# Altium PCB PCB1.PcbDoc
Units mil, origin at the board's own origin, x right, y up, seen from the top; angles counter-clockwise.
Board outline 3740.16 x 2755.91 mil, 2 copper layers (Top Layer, Bottom Layer); 17 components, 18 nets, 97 pads, 0 vias.
Unrouted connection lines stored in the file: 3.
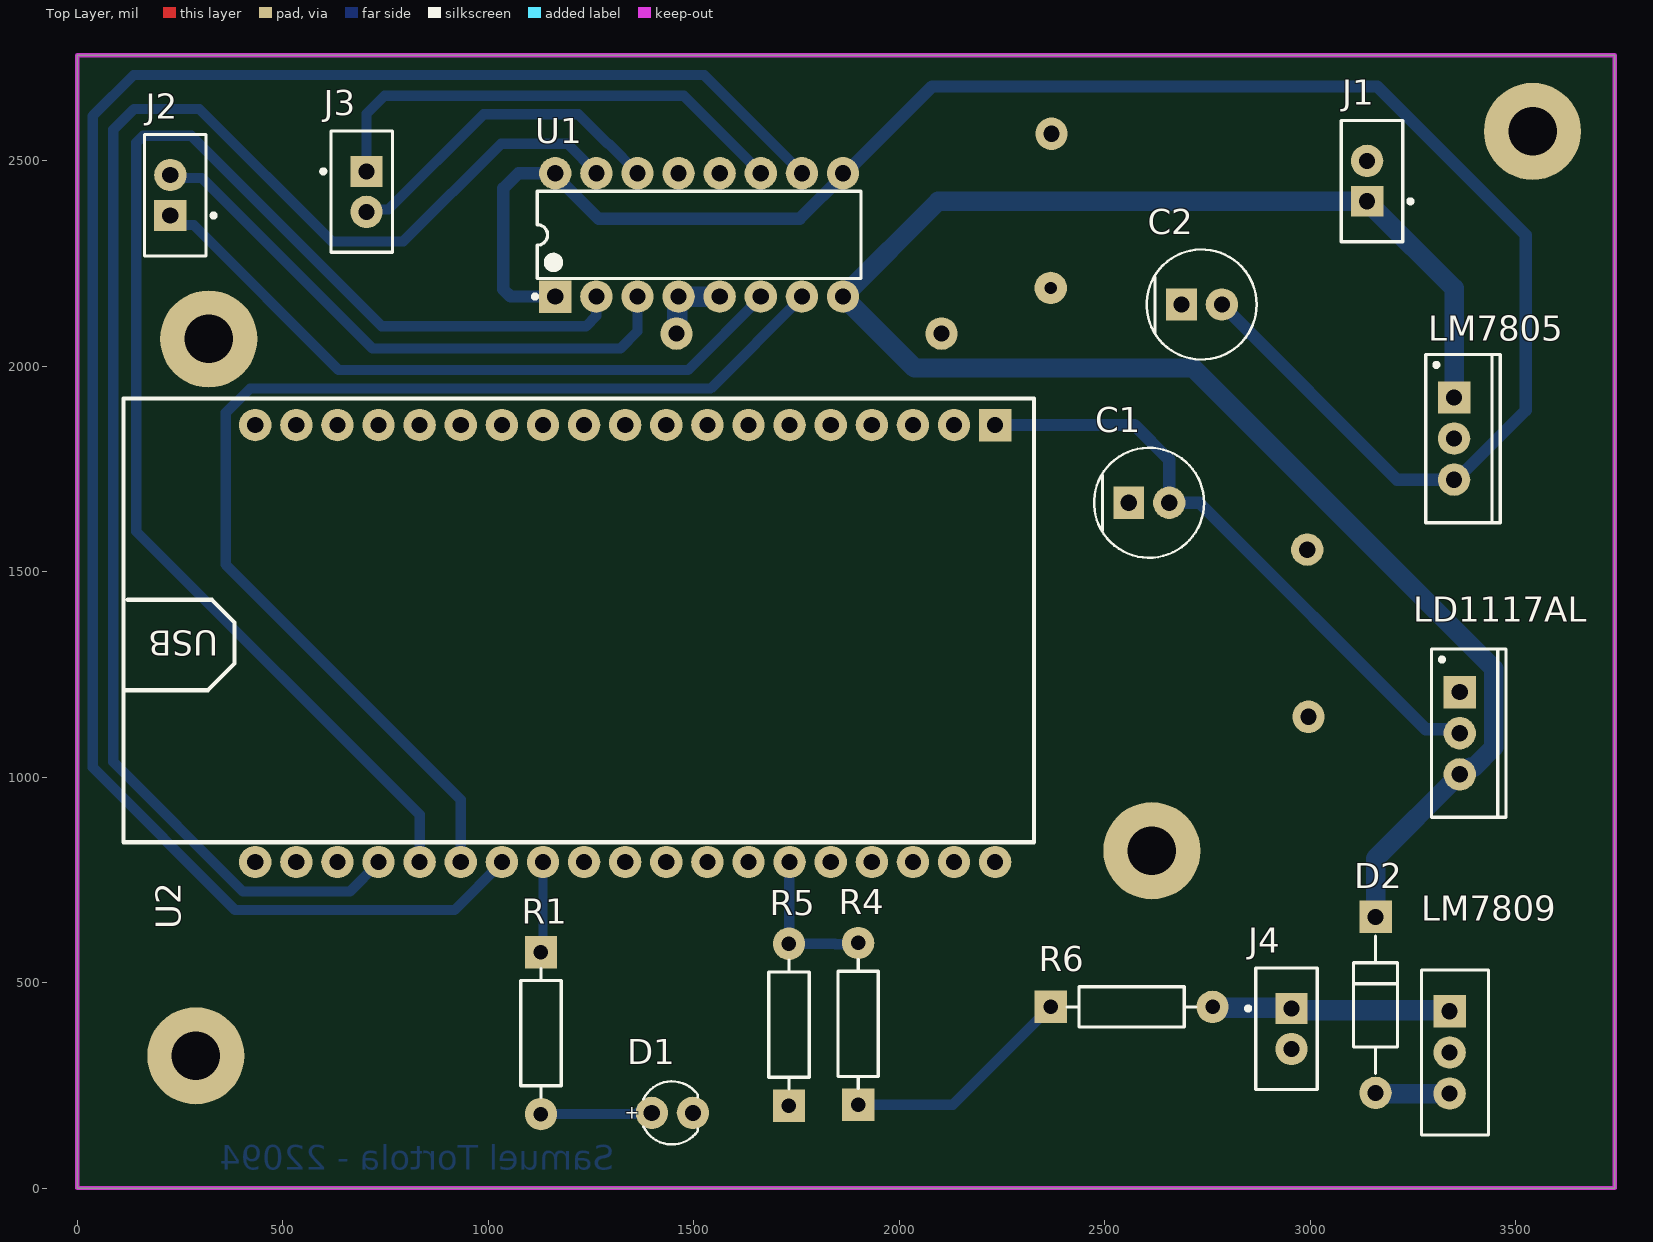
[diagram p0: Top Layer view]
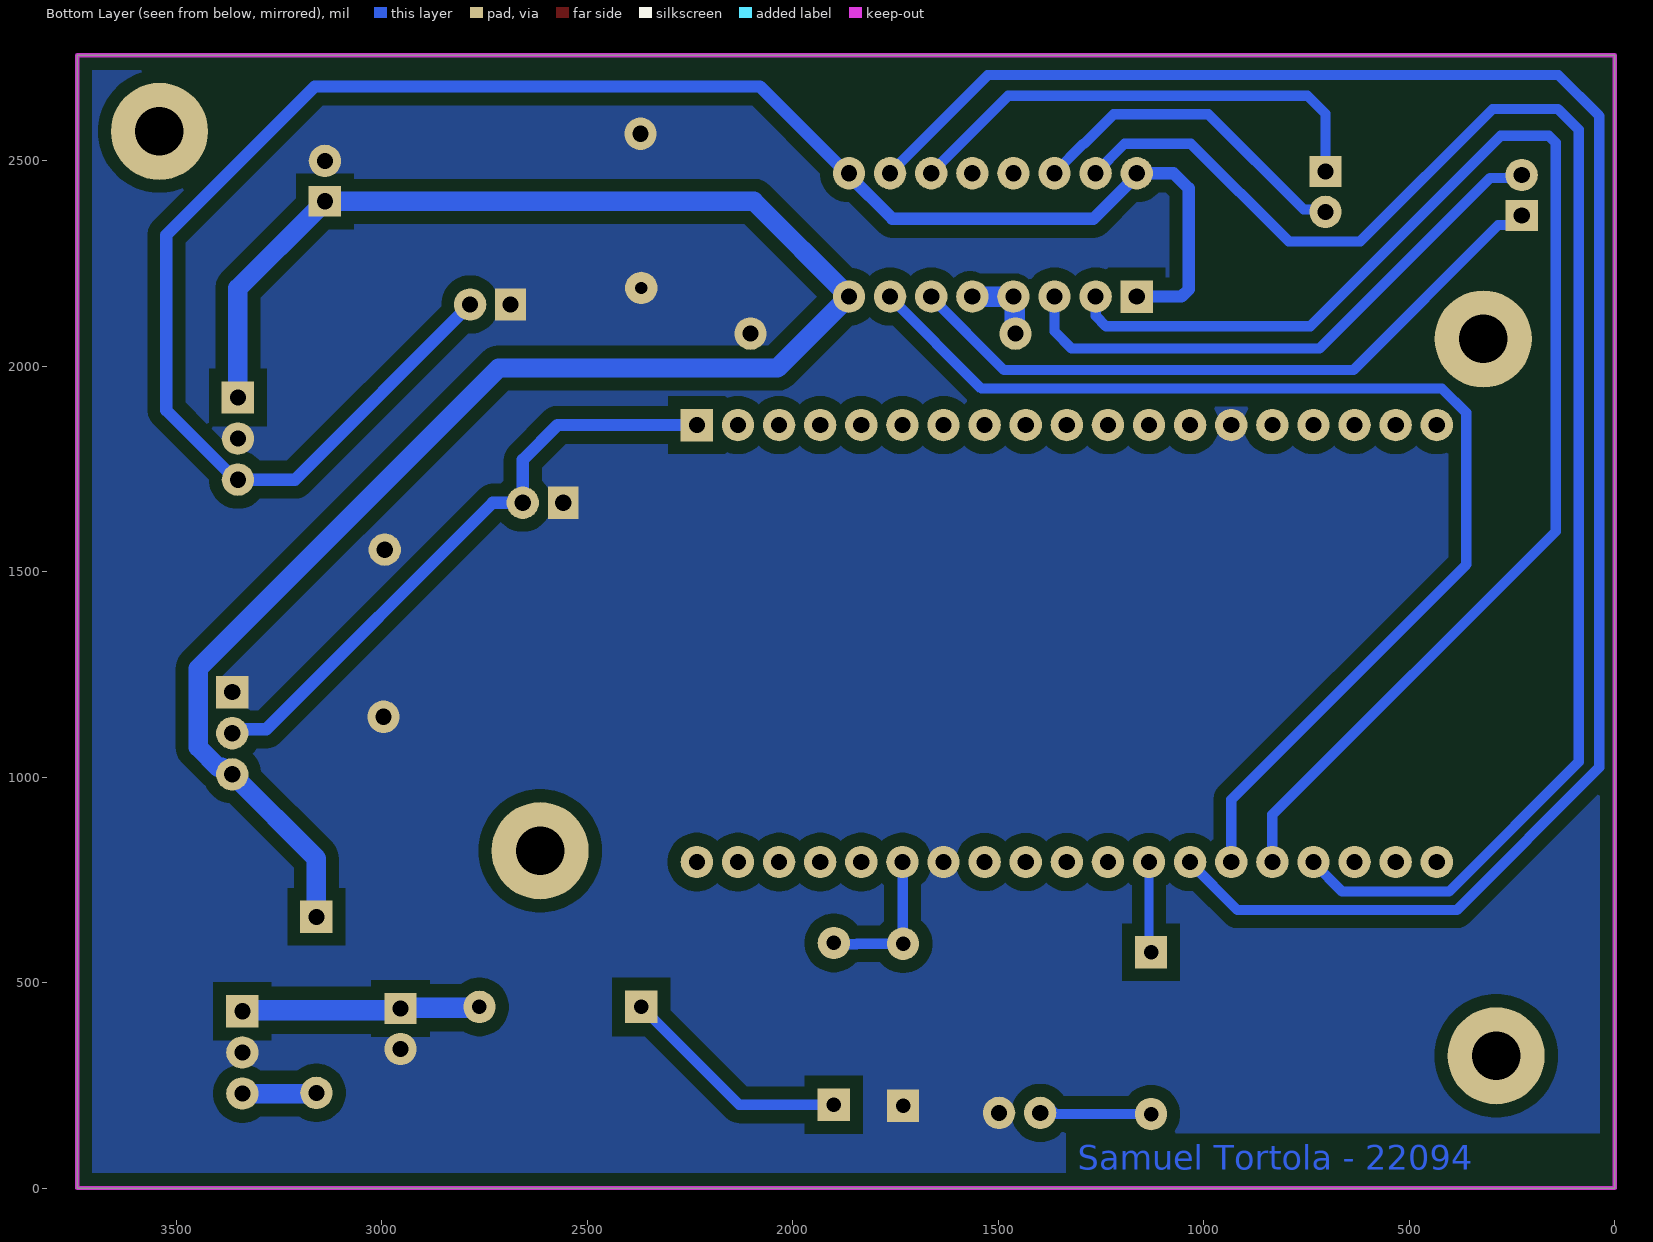
[diagram p1: Bottom Layer view, seen from below]
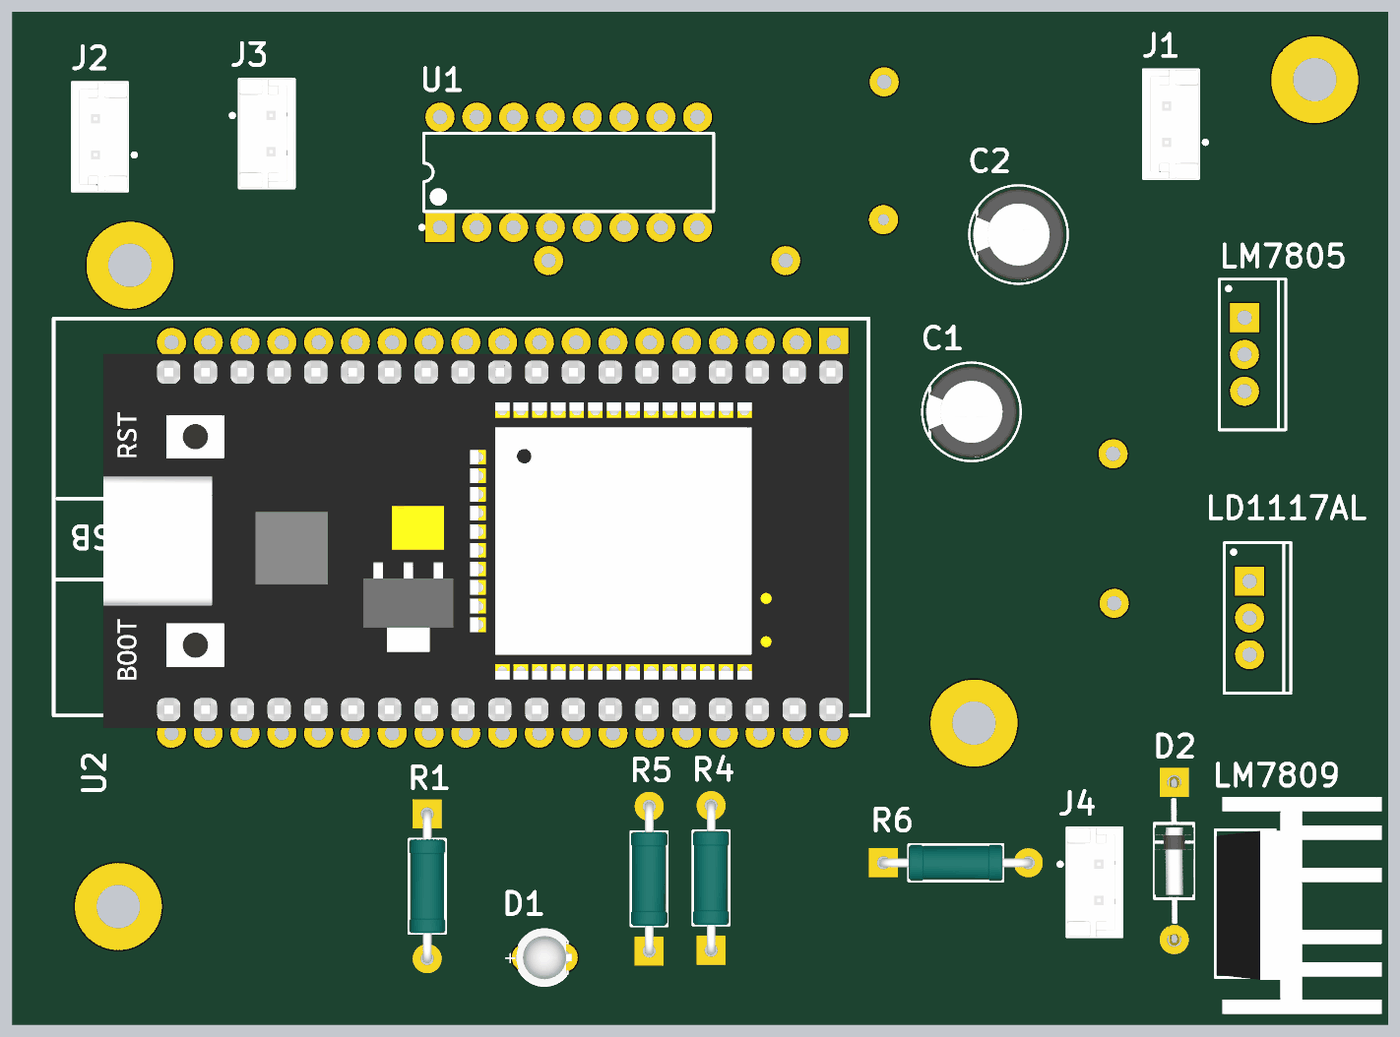
[diagram p2: 3D render of the assembled board from above, using the file's embedded part models]

## Layer stack, top to bottom
Top Solder: solder mask 0.4, Solder Resist, Dk 3.5
Top Layer: signal copper 1.4
Dielectric 1: dielectric 12.6, FR-4, Dk 4.8
Bottom Layer: signal copper 1.4
Bottom Solder: solder mask 0.4, Solder Resist, Dk 3.5

## Board outline
0,0 3740.16,0 3740.16,2755.91 0,2755.91

## Design rules (kind name [scope] priority, off if disabled: settings)
Clearance [All] p1: gap=20 ignorepadtopadclearanceinfootprint=FALSE except(31.5: Arc-Fill Arc-Poly Arc-Region Track-Fill Track-Poly Track-Region SMDPad-Fill SMDPad-Poly SMDPad-Region THPad-Fill THPad-Poly THPad-Region Via-Fill Via-Poly Via-Region Fill-Fill Fill-Poly Fill-Region Poly-Poly Poly-Region Region-Region)
Creepage [All] p1: checkdistance=20 applytopolygonpour=TRUE
HoleSize [All] p1: absolutevalues=TRUE maxlimit=137.8 minlimit=1 maxpercent=80.000 minpercent=20.000
MinimumSolderMaskSliver [All] p1: minsoldermaskwidth=0
PlaneClearance [All] p1: clearance=30
PlaneConnect [All] p1: planeconnectstyle=Direct reliefexpansion=20 reliefentries=4 reliefconductorwidth=10 reliefairgap=10
PolygonConnect [All] p1: connectstyle=Direct reliefconductorwidth=10 reliefentries=4 polygonreliefangle="90 Angle" airgapwidth=10
RoutingCorners [All] p1: cornerstyle=Round minsetback=100 maxsetback=100
RoutingVias [All] p1: holewidth=28 width=60 viastyle="Through Hole" minholewidth=28 minwidth=60 maxholewidth=28 maxwidth=70
SilkToSolderMaskClearance [IsPad] p1: minsilkscreentomaskgap=0 clearancetoexposedcopper=TRUE
SolderMaskExpansion [All] p1: expansion=4 istentingtop=FALSE
Width J4_1 [InNet('NetJ4_1')] p1: maxlimit=51 minlimit=49 preferedwidth=50
Width VBAT [InNet('VBAT')] p2: maxlimit=48 minlimit=44 preferedwidth=47
Width D2_2 [InNet('NetD2_2')] p3: maxlimit=48 minlimit=44 preferedwidth=47
Width LED [InNet('LED')] p4: maxlimit=22 minlimit=20 preferedwidth=21
Width GND [InNet('GND')] p5: maxlimit=51 minlimit=48 preferedwidth=50
Width mot2_2 [InNet('mot2_2')] p6: maxlimit=26 minlimit=20 preferedwidth=25
Width mot2_1 [InNet('mot2_1')] p7: maxlimit=26 minlimit=20 preferedwidth=25
Width mot1_2 [InNet('mot1_2')] p8: maxlimit=26 minlimit=20 preferedwidth=25
Width mot1_1 [InNet('mot1_1')] p9: maxlimit=26 minlimit=20 preferedwidth=25
Width 3.3 [InNet('+3.3V')] p10: maxlimit=31 minlimit=29 preferedwidth=30
Width 5V [InNet('+5V')] p11: maxlimit=31 minlimit=29 preferedwidth=30
Width todos [All] p12: maxlimit=26 minlimit=20 preferedwidth=25
24 further rules are at their usual default settings.

## Components (designator, comment, footprint, x,y, rotation, side; value= is the part's Value field where it differs from the comment)
C1 "100uF, 16V" FP-RAD-TH-D_6_3_0_5-L_7_1-MFG 2607.28,1667.32 r0 top
C2 "100uF, 16V" FP-RAD-TH-D_6_3_0_5-L_7_1-MFG 2735.24,2149.61 r0 top
D1 "Blue LED" WL-TMRW_D3.9H10.5 1447.64,183.07 r0 top
D2 "UF4007" FP-017AH-MFG 3158.46,445.87 r270 top value=17pF
J1 "B2B-EH-A(LF)(SN)" FP-B2B-EH-A_LF_SN-MFG 3149.61,2449.8 r90 top
J2 "B2B-EH-A(LF)(SN)" FP-B2B-EH-A_LF_SN-MFG 238.19,2415.35 r90 top
J3 "B2B-EH-A(LF)(SN)" FP-B2B-EH-A_LF_SN-MFG 691.93,2424.21 r270 top
J4 "B2B-EH-A(LF)(SN)" FP-B2B-EH-A_LF_SN-MFG 2941.93,387.8 r270 top
LD1117AL "LD1117V33C" TO220 3363.19,1106.69 r270 top
LM7805 "LM7805" TO220 3349.41,1823.43 r270 top
LM7809 "LM7809CT" TO254P470X1016X1879-3P 3338.58,430.12 r0 top
R1 "330Ohm" FP-MRS25-MFG 1127.95,376.97 r270 top
R4 "27K Ohm" FP-MRS25-MFG 1899.61,399.61 r90 top
R5 "10K Ohm" FP-MRS25-MFG 1731.3,397.64 r90 top
R6 "2K Ohm" FP-MRS25-MFG 2564.96,440.94 r0 top
U1 "L293D" STM-L293D-16 1512.8,2318.9 r90 top
U2 "ESP32" "ESP32 DEV KIT" 2232.87,1856.3 r180 top

## Footprints (in the part's own frame and the unit in brackets; to place one, negate y for a bottom-side part, rotate by r counter-clockwise, add the part's x,y. Pads: shape width x height; smd on the part's side, far side on the other; paste and mask are expansions set on the pad)
"ESP32 DEV KIT" [mm]
  rect 2x2 hole 1: 1(0,0)
  round 2 hole 1: 2(2.54,0) 3(5.08,0) 4(7.62,0) 5(10.16,0) 6(12.7,0) 7(15.24,0) 8(17.78,0) 9(20.32,0) 10(22.86,0) 11(25.4,0) 12(27.94,0) 13(30.48,0) 14(33.02,0) 15(35.56,0) 16(38.1,0) 17(40.64,0) 18(43.18,0) 19(45.72,0) 20(45.72,27) 21(43.18,27) 22(40.64,27) 23(38.1,27) 24(35.56,27) 25(33.02,27) 26(30.48,27) 27(27.94,27) 28(25.4,27) 29(22.86,27) 30(20.32,27) 31(17.78,27) 32(15.24,27) 33(12.7,27) 34(10.16,27) 35(7.62,27) 36(5.08,27) 37(2.54,27) 38(0,27)
  silkscreen extent -2.41,-1.65 53.85,25.78, body extent -1.08,0.79 50.42,26.64, height 8.3
FP-017AH-MFG [mm]
  rect 2x2 hole 1 paste-2539.97 mask+0: 1(-5.438,0)
  round 2 hole 1 paste-2539.97 mask+0: 2(5.438,0)
  silkscreen extent -4.24,-1.36 4.24,1.36, body extent -6.34,-1.46 6.34,1.46, height 0.25
FP-B2B-EH-A_LF_SN-MFG [mm]
  rect 1.9x2 hole 1 paste-2539.97 mask+0: 1(-1.25,0.3)
  round 2 hole 1 paste-2539.97 mask+0: 2(1.25,0.3)
  silkscreen extent -3.75,-2.5 3.75,1.9, body extent -3.85,-2 3.85,2, height 0.25
FP-MRS25-MFG [mm]
  rect 2x2 hole 0.9 paste-2539.97 mask+0: 1(-5,0)
  round 2 hole 0.9 paste-2539.97 mask+0: 2(5,0)
  silkscreen extent -3.98,-1.25 3.98,1.25, body extent -5.72,-1.35 5.72,1.35, height 0.25
FP-RAD-TH-D_6_3_0_5-L_7_1-MFG [mm]
  rect 1.9x2 hole 1 paste-2539.97 mask+0: 1(-1.25,0)
  round 2 hole 1 paste-2539.97 mask+0: 2(1.25,0)
  silkscreen extent -3.4,-3.4 3.4,3.4, body extent -3.5,-3.5 3.5,3.5, height 0.25
STM-L293D-16 [mm] "DIP, 16-Leads, Body 20x6.85mm, Pitch 2.54mm"
  rect 2x2 hole 1: 1(-3.81,8.89)
  round 2 hole 1: 2(-3.81,6.35) 3(-3.81,3.81) 4(-3.81,1.27) 5(-3.81,-1.27) 6(-3.81,-3.81) 7(-3.81,-6.35) 8(-3.81,-8.89) 9(3.81,-8.89) 10(3.81,-6.35) 11(3.81,-3.81) 12(3.81,-1.27) 13(3.81,1.27) 14(3.81,3.81) 15(3.81,6.35) 16(3.81,8.89)
  silkscreen extent -3.93,-10 2.7,10.26, body extent -3.93,-10 3.93,10, height 5.1
TO220 [mm] "TO, Thru-Hole, Vertical, Heatsink Mounted; 3 In-Line Leads; Pitch 2.54 mm"
  rect 2x2 hole 1: 1(-2.54,0)
  round 2 hole 1: 2(0,0) 3(2.54,0)
  silkscreen extent -5.2,-1.75 5.2,2.85, body extent -5.25,-1.8 5.25,2.9, height 19.7
TO254P470X1016X1879-3P [mm]
  rect 2x2 hole 1: 1(0,0)
  round 2 hole 1: 2(0,-2.54) 3(0,-5.08)
  silkscreen extent -1.75,-7.64 2.39,2.56, body extent -1.65,-10.17 9.75,4.83, height 21.5
WL-TMRW_D3.9H10.5 [mm] "THT Mono-color Round LED, 2-leads"
  round 2 hole 1: 1(1.27,0) 2(-1.27,0)
  silkscreen extent -1.79,-1.95 1.57,1.95, body extent -1.97,-1.95 1.85,1.95, height 10.55

## Part data
C1 C2: library part CMP-05427-001316-1, "Aluminum Electrolytic Capacitors (Radial Lead Type) 100uF ±20% 16V", Capacitance=100uF, Case/Package=Radial, Max Operating Temperature=85°C, Min Operating Temperature=-40°C, Package Quantity=2000, Ripple Current=91mA, Tolerance=20%, Voltage=16V, Diameter=6.3mm, Height=7mm, Height - Seated (Max)=0.315inch, Lead Diameter=0.45mm, Lead Pitch=2.5mm, Length=7mm, Life (Hours)=1000Hour, Mount="Through Hole", Packaging="Tape and Reel", Polarity=Polar, Radiation Hardening=No, RoHS Compliant=Yes, Series=KA, Termination=Radial, Voltage Rating=16V, Voltage Rating (DC)=16V
D1: library part CMP-1489-00002-2, Case/Package=Radial, Color=Blue, Forward Current=100mA, Forward Voltage=2.8V, Max Operating Temperature=85°C, Max Reverse Voltage (DC)=5V, Min Operating Temperature=-40°C, Test Current=20mA, Dominant Wavelength=470nm, Height=5.3mm, Length=3mm, Lens Size=3mm, Lens Style="Circular, Clear, Round", Luminous Intensity=3.8cd, Mount="Through Hole", NexarPartId=29717808, Packaging=Bulk, Peak Wavelength=465nm, REACH SVHC=Unknown, RoHS=Compliant, Viewing Angle=30°, Wavelength=470nm, Width=3mm
D2: library part CMP-2000-05028-2, "DIODE GEN PURP 1KV 1A DO41", Capacitance=17pF, Forward Current=1A, Manufacturer="ON Semiconductor", Max Junction Temp=+150°C, Max Repetitive Reverse Voltage=1000V, Max Surge Forward Current=30A, Package=017AH, Peak Reverse Current=10uA, Temperature="-65°C to +150°C", Temperature Range Low=-65°C, Automotive=No, Category=Diode, ComponentLink2Description=Datasheet, ComponentLink2URL=https://www.onsemi.com/pub/Collateral/UF4007-D.pdf, Device Class L1="Discrete Semiconductors", Device Class L2=Diodes, Device Class L3="Rectifier Diodes", Digikey Description="DIODE GEN PURP 1KV 1A DO41", Footprint Url=https://www.onsemi.com/pub/Collateral/017AH.PDF, Height=2.72mm, Lead Free=Yes, Manufacturer Part Number=UF4007, Mouser Description="Rectifiers 1000V 1a Rectifier Glass Passivated", Octopart=https://octopart.com/uf4007-on+semiconductor-84331693, RoHS=TRUE, Temperature Range High=+150°C
J1 J2 J3 J4: library part CMP-17439-000026-1, "CONN HEADER VERT 2POS 2.5MM", Color=Natural, Contact Resistance=20mR, Current Rating=3A, Housing Color=White, Max Operating Temperature=85°C, Max Voltage Rating (AC)=250V, Min Operating Temperature=-25°C, Connector Type=Plug, Contact Material="Copper Alloy", Contact Mating Length=0.13inch, Contact Plating=Tin, Contact Type="Male Pin", Depth=3.8mm, Fastening Type=Detent, Gender=Male, Housing Material=Nylon, Lead Free="Lead Free", Length=7.5mm, Max Current Rating=3A, Mount="Through Hole", Number of Contacts=2, Number of Positions=2, Number of Rows=1, Orientation=Straight, Packaging=Bulk, Pitch=2.5mm, Series=EH, Termination=Press-Fit, Voltage Rating=250V
LD1117AL: library part CMP-0244-00471-1, "Fixed Low Drop Positive Voltage Regulator, 3.3V, 3-Pin TO-220", ComponentLink1Description="Manufacturer URL", ComponentLink1URL=http://www.st.com, ComponentLink2Description=Datasheet, ComponentLink2URL=http://www.st.com/internet/com/TECHNICAL_RESOURCES/TECHNICAL_LITERATURE/DATASHEET/CD00000544.pdf, ComponentLink3Description="Package Specification", ComponentLink3URL=http://www.st.com/internet/com/TECHNICAL_RESOURCES/TECHNICAL_LITERATURE/PACKAGE_INFORMATION/CD00004649.pdf, DatasheetVersion=1/11/2011, PackageDescription="TO, Thru-Hole, Vertical, Heatsink Mounted; 3 In-Line Leads; Pitch 2.54 mm", PackageReference=TO220, PackageVersion=ver3.0
LM7805: "Positive Voltage Regulator, 5V, 3-Pin TO-220", ComponentLink1Description="Manufacturer URL", ComponentLink1URL=http://www.st.com, ComponentLink2Description=Datasheet, ComponentLink2URL=http://www.st.com/internet/com/TECHNICAL_RESOURCES/TECHNICAL_LITERATURE/DATASHEET/CD00000444.pdf, ComponentLink3Description="Package Specification", ComponentLink3URL=http://www.st.com/internet/com/TECHNICAL_RESOURCES/TECHNICAL_LITERATURE/PACKAGE_INFORMATION/CD00004649.pdf, DatasheetVersion=16/11/2011, PackageDescription="TO, Thru-Hole, Vertical, Heatsink Mounted; 3 In-Line Leads; Pitch 2.54 mm", PackageReference=TO220, PackageVersion=ver3.0
LM7809: "Linear Voltage Regulator IC 1 Output 1A TO-220-3", Package="TO-220-3 Fujitsu", Availability=Unavailable, MF=Fujitsu, MP=LM7809C, Price=None, SnapEDA_Link=https://www.snapeda.com/parts/LM7809C/Fujitsu/view-part/1233224/?ref=snap
R1 R4 R5 R6: library part CMP-02408-000049-1, "RES 953 OHM 0.6W 1% AXIAL", Case/Package=Axial, Max Operating Temperature=155°C, Max Power Dissipation=600mW, Min Operating Temperature=-55°C, Resistance=953R, Resistance Tolerance=1%, Resistor Type="Metal Film", Temperature Coefficient=50ppm/°C, Voltage Rating=350V, Construction=Cylindrical, Contact Plating=Tin, Diameter=2.5mm, Lead Free="Lead Free", Lead Length=26mm, Length=6.5mm, Military Standard=Not, Number of Terminations=2, Packaging="Tape and Reel", Power Rating=600mW, Radiation Hardening=No, RoHS Compliant=Yes, Series=MRS25, Technology="THIN FILM", Termination=Axial, Tolerance=1%, Width=2.5mm
U1: library part CMP-2000-06524-1, "Push-Pull Four Channel Driver with Diode, 4.5 to 36 V, -40 to 150 degC, 16-Pin PDIP, RoHS, Tube", Current - Output / Channel=600mA, Current - Peak Output=1.2A, Manufacturer=STMicroelectronics, On-State Resistance=-, Operating Temperature=-40°C~150°C, Package / Case="16-DIP(0.300\",7.62mm)", Package Description="16-Pin Thru-Hole Dual-In-Line, Body 20 x 6.85 mm, Pitch 2.54 mm", Package Reference=DIP-16, Standard Package=25, Supplier Device Package=16-PowerDIP, Voltage - Supply=4.5V~36V, Category=IntegratedCircuits(ICs), Datasheet URL=http://www.st.com/st-web-ui/static/active/en/resource/technical/document/datasheet/CD00000059.pdf, Datasheet Version=07/2003, Dynamic Catalog=HalfBridge, Family=PMIC-MOSFET,BridgeDrivers-InternalSwitch, Input Type=Non-Inverting, Manufacturer URL=http://www.st.com/, Mounting Technology=ThroughHole, Mounting Type=ThroughHole, Number of Outputs=4, Other Names=497-2936-5, Other Related Documents=L293DViewAllSpecifications, Packaging=Tube, PartNumber=L293D, Series=-, Type=HalfBridge
U2: library part "ESP32 Dev Module Kit", "ESP32 Depelopment version 38 pines"

## Free pads (board coordinates)
  round 236.22 hole 118.11: 149(288.39,321.85) 150(2614.17,820.87) 151(3540.35,2570.87) 152(319.88,2065.94)
  round 78.74 hole 30: 155(2368.11,2189.96)
  round 78.74 hole 39.37: 156(2370.08,2564.96) 157(2992.13,1553.15) 158(2995.08,1146.65) 159(1457.68,2078.74) 160(2102.36,2078.74)

## Nets (pads, with @x,y where several pads share a name; then routed paths per layer and width w, separated by ;. In a path a pad name is that pad's centre, name@x,y a point inside that pad or via, vN(x,y) a via of type N, cw(c..) or ccw(c..) an arc to the next point about the centre after c; other vN are vias at no path point)
+3.3V: C1.2 LD1117AL.2 U2.1 | length 1501.9
  Bottom Layer w30: U2.1 2571.85,1856.3 2656.5,1771.65 C1.2 2729.37,1667.32 3280.67,1116.02 3353.86,1116.02 LD1117AL.2
+5V: C2.2 LM7805.3 U1.1 U1.9 U1.16 | length 4620.5
  Bottom Layer w30: U1.1 1053.99,2168.9 1036.42,2186.47 1036.42,2432.09 1073.23,2468.9 U1.16 ; U1.16@1162.8,2463.72 1268.25,2358.27 1757.34,2358.27 1865.38,2466.31 2079.19,2680.12 3162.4,2680.12 3523.62,2318.9 3523.62,1892.46 3354.58,1723.43 LM7805.3 3210.63,1723.43 C2.2
GND: C1.1 C2.1 D1.1 J1.2 J4.2 LD1117AL.1 LM7805.2 LM7809.2 pad.155 pad.156 pad.157 pad.158 pad.159 pad.160 R5.1 U1.4 U1.5 U2.14 U2.32 | length 207
  Top Layer w50: pad.155 pad.155@2369.09,2190.94 ; pad.156@2369.09,2563.98 pad.156 ; pad.157 pad.157@2993.6,1551.67 ; pad.158@2993.6,1148.13 pad.158
  Bottom Layer w50: pad.159 1459.59,2080.65 1459.59,2165.69 U1.4 U1.5 U1.5@1568.29,2174.4
LED: R1.1 U2.27 | length 221.5
  Bottom Layer w21: R1.1 1132.87,578.74 U2.27
mot1_1: U1.2 U2.24 | length 3410.5
  Bottom Layer w25: U2.24 832.87,908.27 143.7,1597.44 143.7,2543.31 160.43,2560.04 277.26,2560.04 740.27,2097.03 1237.78,2097.03 1262.8,2122.05 1262.8,2154.36 1262.8,2161.63 U1.2
mot1_2: U1.7 U2.25 | length 2851.9
  Bottom Layer w25: U2.25 932.87,945.08 361,1516.95 361,1886.07 420.09,1945.16 1540.69,1945.16 1762.8,2167.26 U1.7 U1.7@1762.8,2171.26
mot2_1: U1.10 U2.26 | length 4639.7
  Bottom Layer w25: U2.26 1032.87,791.67 917.64,676.44 384.47,676.44 37.5,1023.4 37.5,2608.37 136.81,2707.68 1525.66,2707.68 1762.8,2470.54 U1.10
mot2_2: U1.15 U2.23 | length 3803
  Bottom Layer w25: U2.23 732.87,791.67 662.64,721.44 403.11,721.44 87.6,1036.94 87.6,2574.8 137.8,2625 297.24,2625 619.11,2303.13 793.29,2303.13 1030.93,2540.77 1192.56,2540.77 1262.8,2470.54 U1.15
NetD1_2: D1.2 R1.2 | length 279.7
  Bottom Layer w25: R1.2 1359.67,180.12 1383.29,203.74 D1.2@1397.83,203.74
NetD2_2: D2.2 LM7809.3 | length 181.8
  Bottom Layer w47: D2.2 3160.47,229.76 3336.57,229.76 LM7809.3@3338.58,227.76
NetJ2_1: J2.1 U1.6 | length 1667.2
  Bottom Layer w25: J2.1 249.55,2342.97 283.01,2342.97 635.83,1990.16 1485.69,1990.16 1662.8,2167.26 U1.6
NetJ2_2: J2.2 U1.3 | length 1413.3
  Bottom Layer w25: J2.2 233.37,2457.58 303.25,2457.58 718.5,2042.32 1320.87,2042.32 1362.8,2084.25 U1.3
NetJ3_1: J3.1 U1.11 | length 1197
  Bottom Layer w25: J3.1 703.74,2614.17 747.32,2657.76 1475.58,2657.76 1662.8,2470.54 U1.11
NetJ3_2: J3.2 U1.14 | length 818.1
  Bottom Layer w25: J3.2 709.47,2380.73 756.72,2380.73 988.74,2612.76 1218.94,2612.76 1290.93,2540.77 1292.56,2540.77 1362.8,2470.54 U1.14
NetJ4_1: J4.1 LM7809.1 R6.2 | length 580.3
  Bottom Layer w50: R6.2 2763.78,438.98 2951.77,438.98 J4.1 2958.37,432.38 LM7809.1@3338.58,432.38
NetR4_1: R4.1 R6.1 | length 567.2
  Bottom Layer w25: R4.1 2129.92,202.76 R6.1
SensorV: R4.2 R5.2 U2.33 | length 367.2
  Bottom Layer w25: U2.33 1732.09,792.52 1732.09,595.28 R5.2 1843.5,594.49 1844.49,593.5 R4.2@1898.6,593.5
VBAT: D2.1 J1.1 LD1117AL.3 LM7805.1 U1.8 | length 4595.5
  Bottom Layer w47: D2.1 3158.46,801.97 LD1117AL.3 ; LM7805.1 3349.41,2188.98 3153.67,2384.72 3153.67,2386.69 3139.76,2400.59 J1.1 2094.49,2400.59 U1.8 2036.61,1995.08 2715.06,1995.08 3446.06,1264.08 3446.06,1072.37 3397.51,1023.82 LD1117AL.3@3388.91,1023.82
pads on no net: U1.12 U1.13 U2.2 U2.3 U2.4 U2.5 U2.6 U2.7 U2.8 U2.9 U2.10 U2.11 U2.12 U2.13 U2.15 U2.16 U2.17 U2.18 U2.19 U2.20 U2.21 U2.22 U2.28 U2.29 U2.30 U2.31 U2.34 U2.35 U2.36 U2.37 U2.38

## Polygon pours and split planes (outlines as drawn)
GND on Bottom Layer "GND_L02_P000" (solid, remove dead copper, pour order 0): 0,2755.91 3740.16,2755.91 3740.16,0 0,0

## Keep-outs
Keep-Out Layer:
  the board outline again, w10

## Other copper
Bottom Layer:
  text "Samuel Tortola - 22094" at 1305.94,44.45 h59.06

## Text inside footprints (layer, text, board x,y; h text height)
D1: Top Overlay "+" at 1331.5,169.29 h31.5
U2: Top Overlay "USB" at 342.87,1356.3 h60 r180